# Altium PCB OBDH_Ed02.PcbDoc
Units mm, origin at the board's own origin, x right, y up, seen from the top; angles counter-clockwise.
Board outline 83.95 x 50.04 mm, 4 copper layers (Top Layer, GND, POWER, Bottom Layer), stack 1.57 mm thick; 100 components, 59 nets, 297 pads, 157 vias.
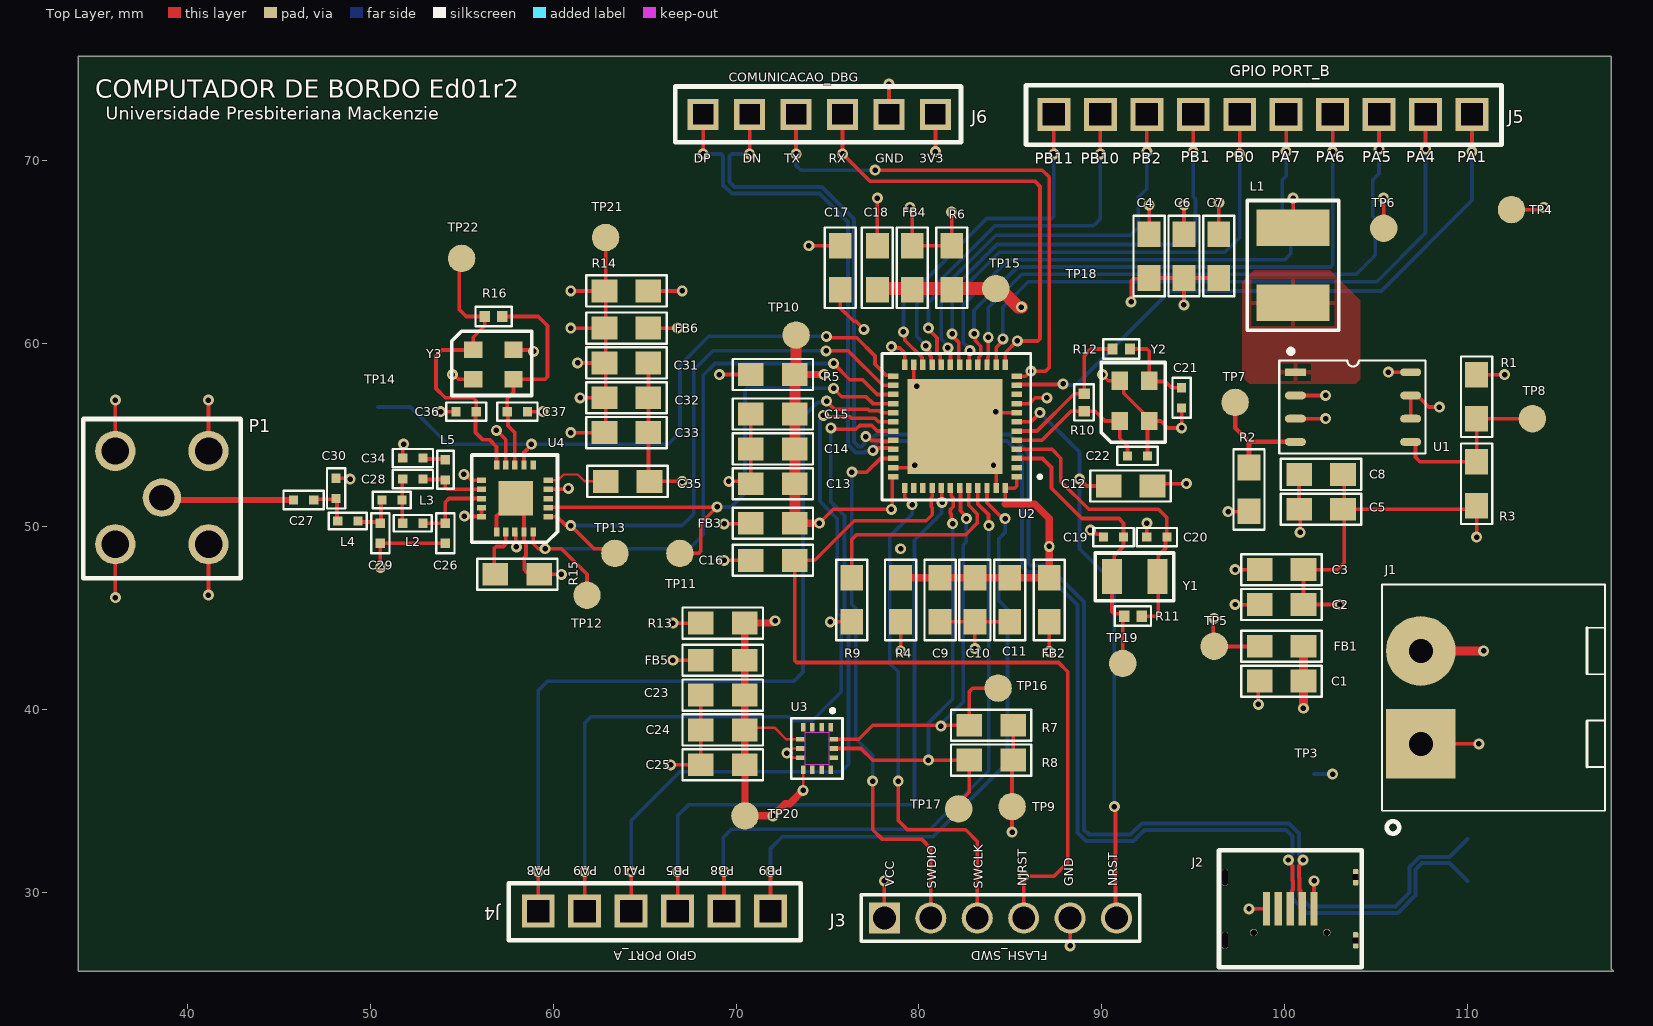
[diagram p0: Top Layer view]
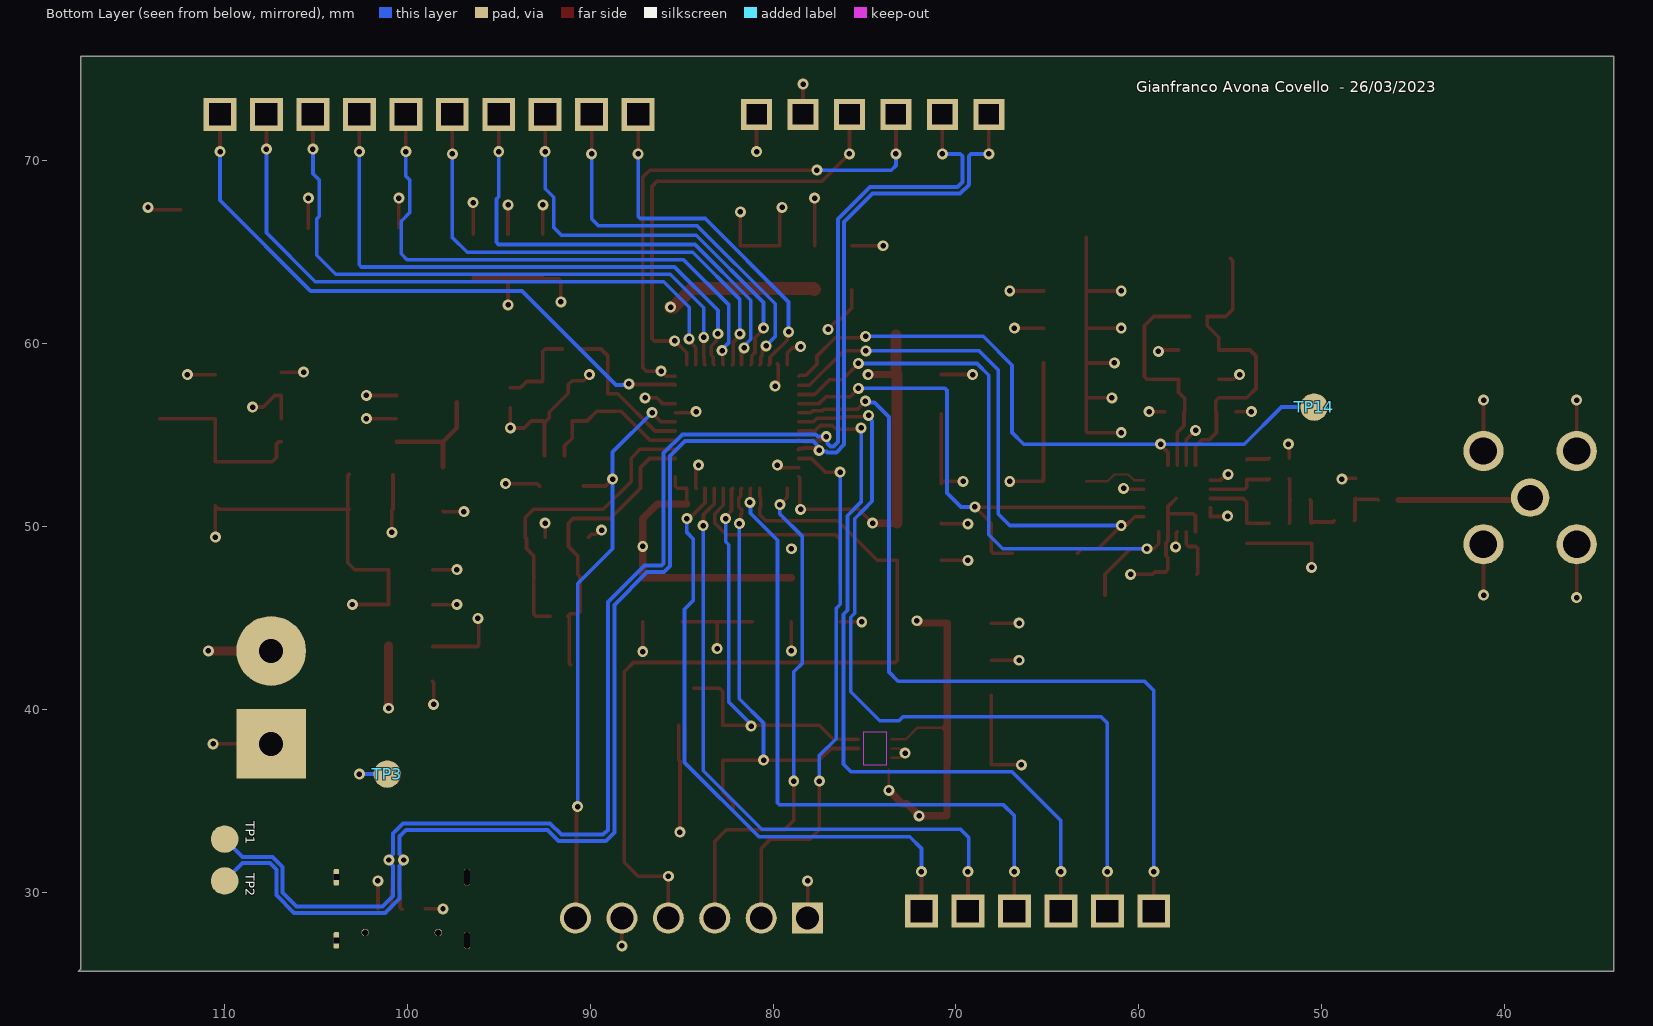
[diagram p1: Bottom Layer view, seen from below]
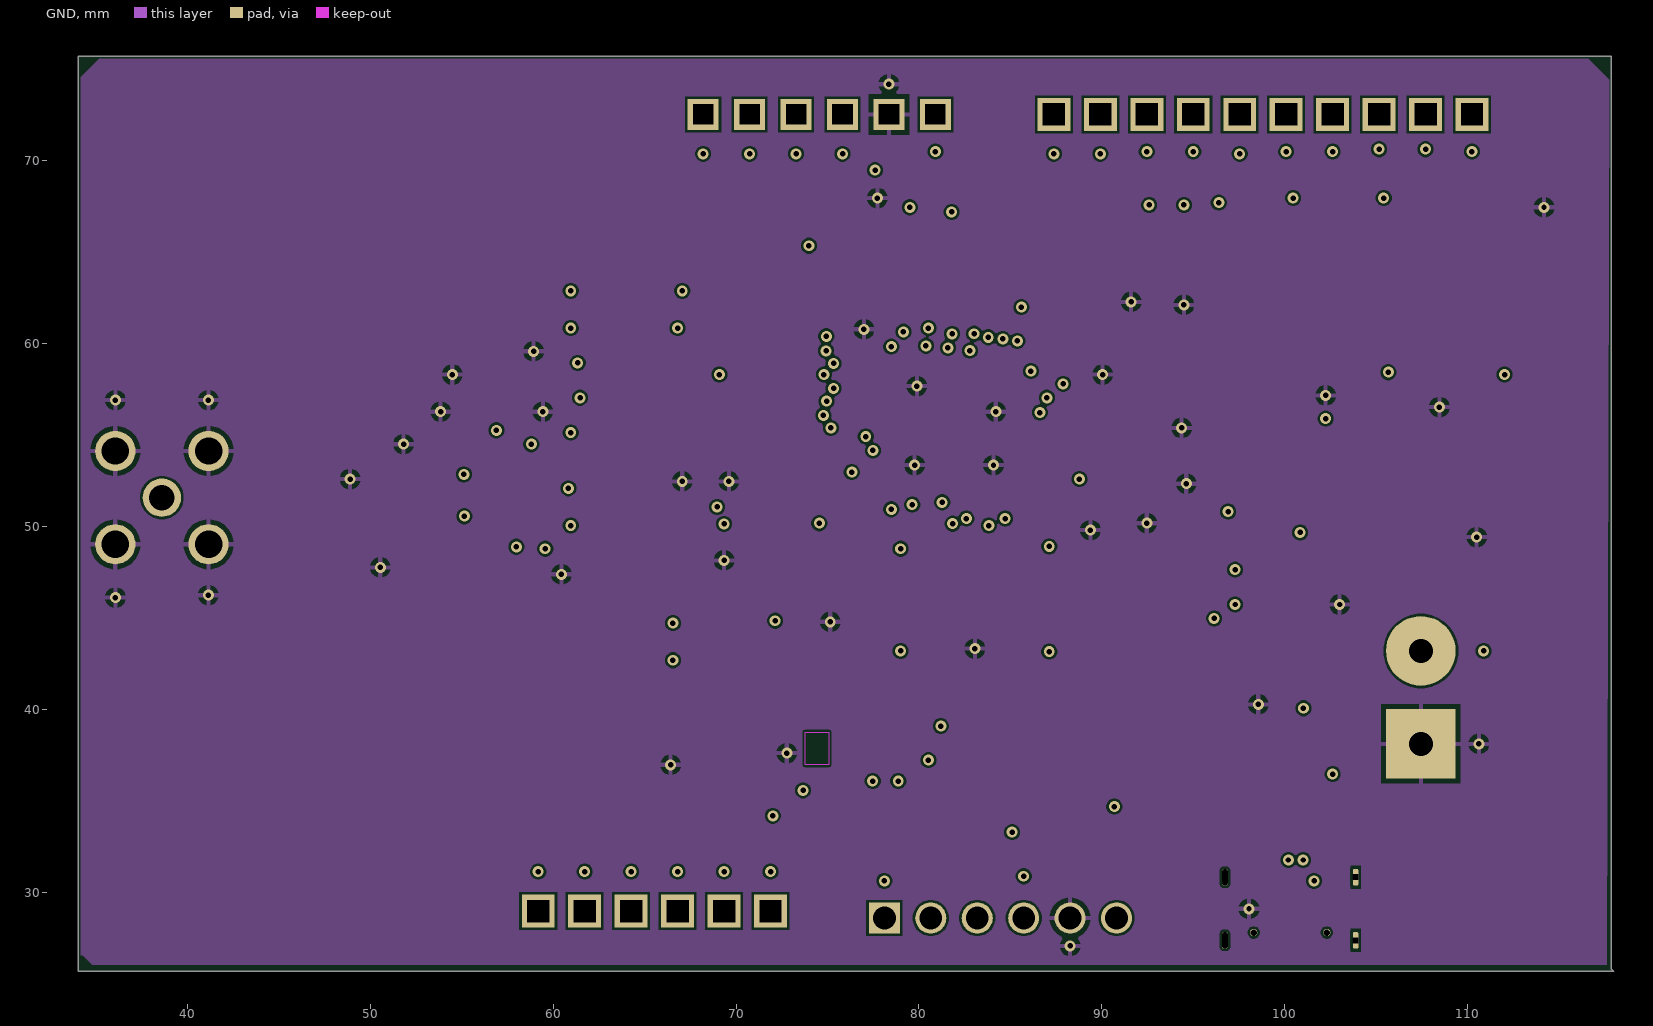
[diagram p2: GND]
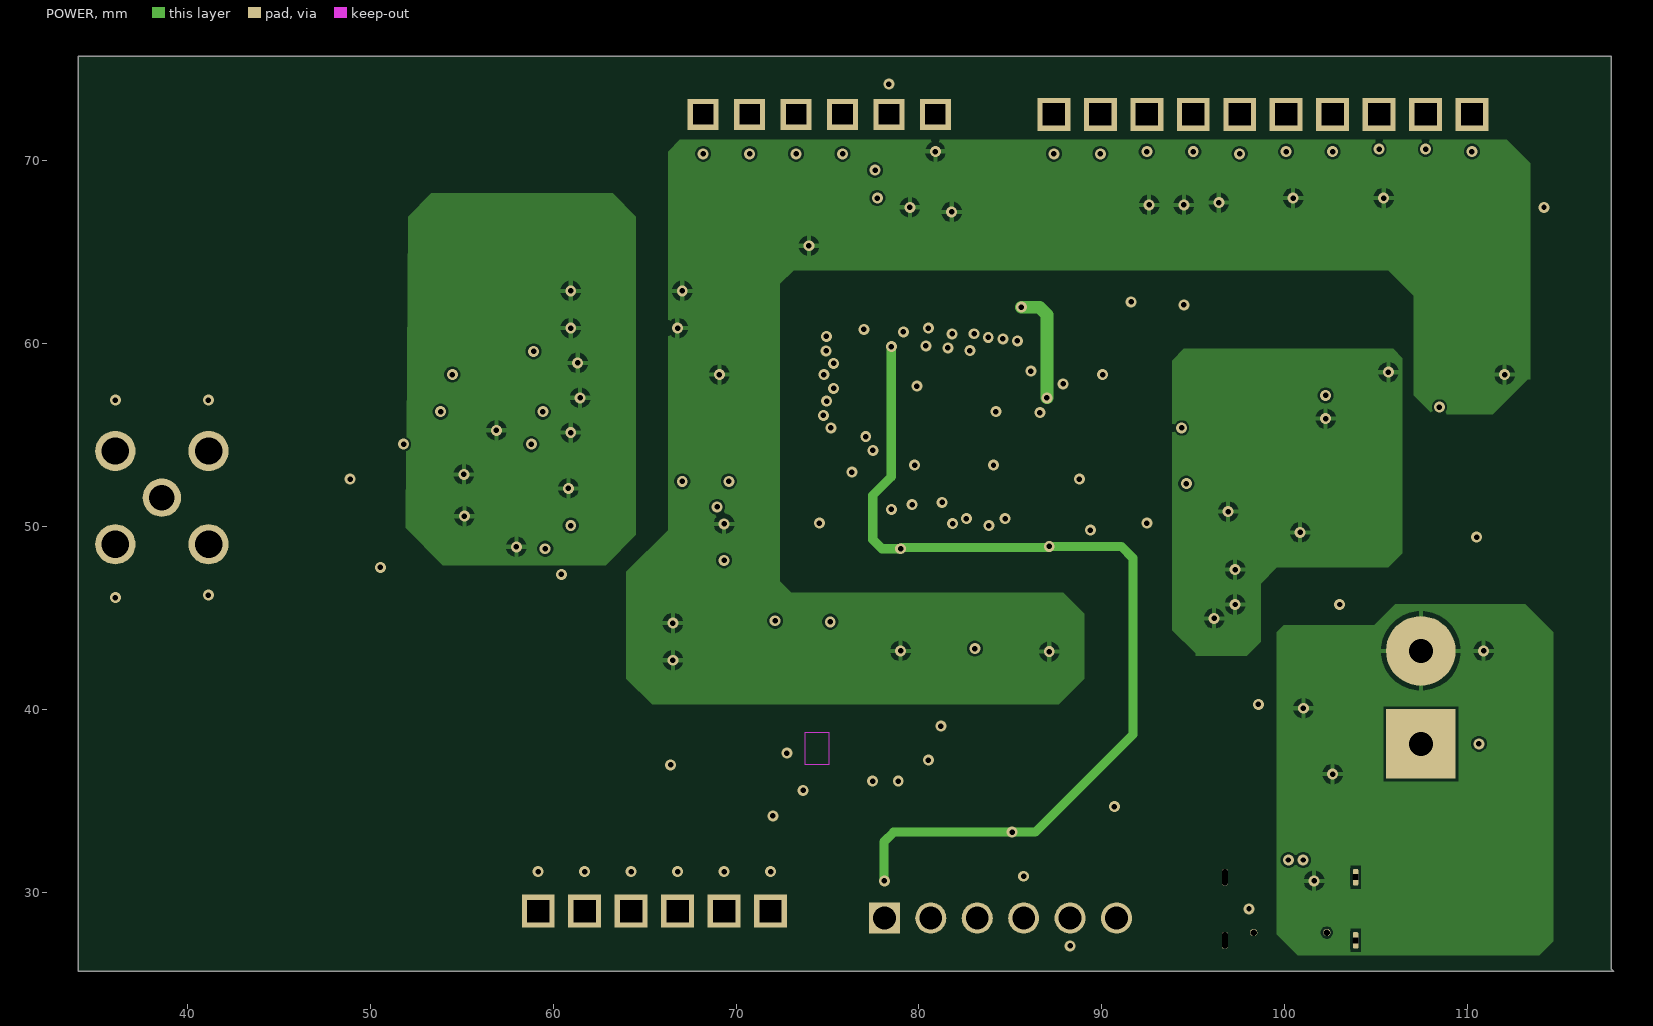
[diagram p3: POWER]
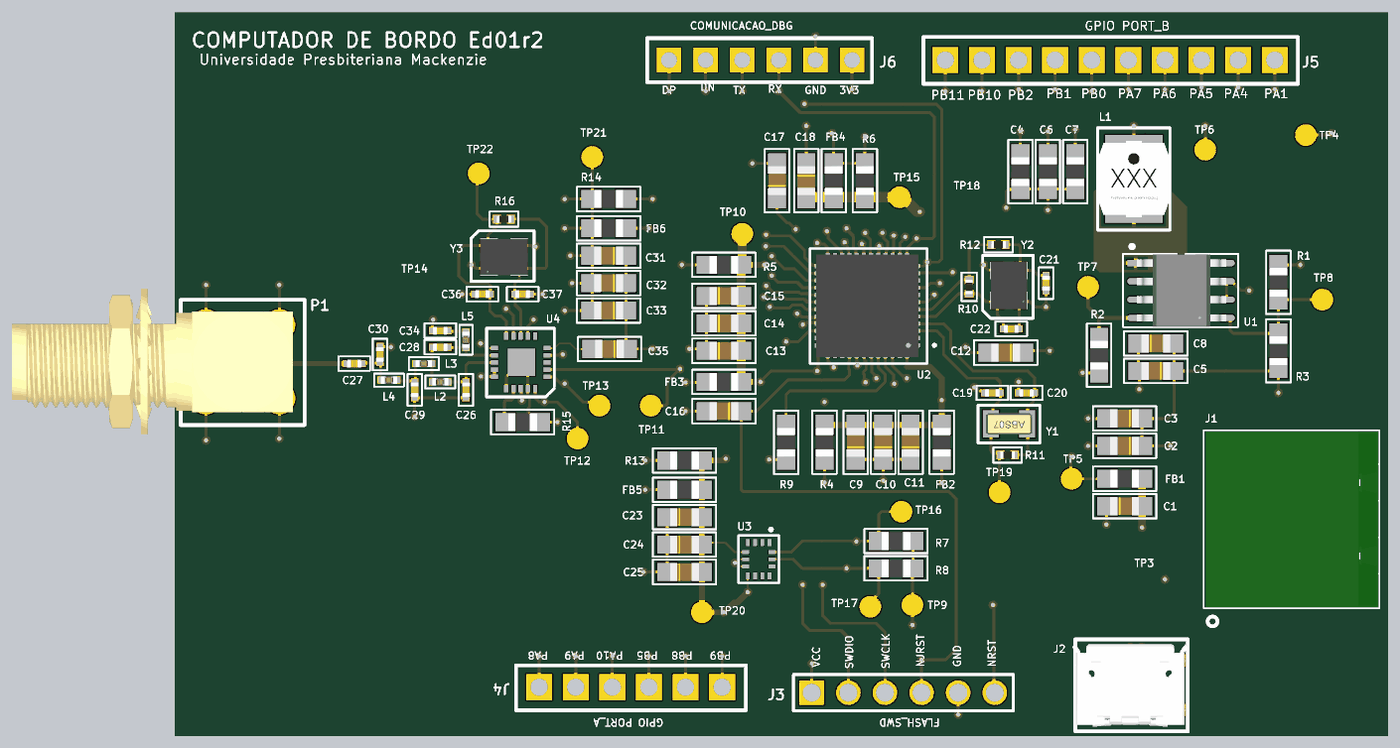
[diagram p4: 3D render of the assembled board from above, using the file's embedded part models]

## Layer stack, top to bottom
Top Solder: solder mask 0.0127, Solder Resist, Dk 3.8
Top Layer: signal copper 0.035
Dielectric 2: prepreg 0.2, PP-022, Dk 4.6
GND: signal copper 0.0175
Dielectric 1: dielectric 1.065, FR-4, Dk 4.6
POWER: signal copper 0.0175
Dielectric 3: prepreg 0.2, PP-022, Dk 4.6
Bottom Layer: signal copper 0.035
Bottom Solder: solder mask 0.0127, Solder Resist, Dk 3.8

## Board outline
34.036,25.654 34.036,75.692 117.856,75.692 117.856,25.781 117.983,25.654

## Design rules (kind name [scope] priority, off if disabled: settings)
Clearance [All] p1: gap=0.127 ignorepadtopadclearanceinfootprint=FALSE
DiffPairsRouting USB [InDifferentialPairClass('USB')] p1: maxlimit=0.127 minlimit=0.127 mostfreqgap=0.127 toplayer_minwidth=0.221 toplayer_maxwidth=0.221 toplayer_prefwidth=0.221 midlayer1_minwidth=0.139 midlayer1_maxwidth=0.139 midlayer1_prefwidth=0.139 midlayer2_minwidth=0.139 midlayer2_maxwidth=0.139 midlayer2_prefwidth=0.139 bottomlayer_minwidth=0.221 bottomlayer_maxwidth=0.221 bottomlayer_prefwidth=0.221 impedanceprofiledriven=TRUE impedanceprofileid={65390795-6F6D-4E48-AEC6-24EED3B5045F} impedanceprofilevalue=90.000000 maxuncoupledlength=12.7
DiffPairsRouting [All] p2: maxlimit=0.4 minlimit=0.2 mostfreqgap=0.2 toplayer_minwidth=0.2 toplayer_maxwidth=0.35 toplayer_prefwidth=0.2 midlayer1_minwidth=0.2 midlayer1_maxwidth=0.35 midlayer1_prefwidth=0.2 midlayer2_minwidth=0.2 midlayer2_maxwidth=0.35 midlayer2_prefwidth=0.2 bottomlayer_minwidth=0.2 bottomlayer_maxwidth=0.35 bottomlayer_prefwidth=0.2 maxuncoupledlength=12.7
PolygonConnect [All] p1: connectstyle=Relief reliefconductorwidth=0.254 reliefentries=4 polygonreliefangle="90 Angle" airgapwidth=0.254
RoutingVias RoutingVias_1 [All] p1: holewidth=0.3 width=0.6 viastyle="Through Hole" minholewidth=0.2 minwidth=0.5 maxholewidth=0.35 maxwidth=0.65 useviatemplates=TRUE viatemplateguid#1={2C4AEFF2-67C5-4B75-B1AF-69D1981BC129} viatemplatename#1=v60h30m0mx0
SilkToSolderMaskClearance [IsPad] p1: minsilkscreentomaskgap=0.127 clearancetoexposedcopper=TRUE
SolderMaskExpansion [All] p1: expansion=0.102 istentingtop=FALSE
Width RF [InNetClass('RF')] p1: maxlimit=0.336 minlimit=0.247 preferedwidth=0.336 toplayer_minwidth=0.336 midlayer1_maxwidth=0.247 midlayer1_prefwidth=0.247 midlayer2_maxwidth=0.247 midlayer2_prefwidth=0.247 bottomlayer_minwidth=0.336 impedanceprofiledriven=TRUE impedanceprofileid={8BED2264-0F78-4ACD-9A72-109358A60653} impedanceprofilevalue=50.000000 minimp=50.000000 maximp=50.000000 favimp=50.000000 // RF impedance
Width [All] p2: maxlimit=10 minlimit=0.127 preferedwidth=0.2
28 further rules are at their usual default settings.

## Classes and differential pairs
net class USB: USB_D_N USB_D_P
net class RF: RF_ANTENNA
component class U_INTERFACE_EXT: J3 J4 J5 J6
differential pair class USB: USB_D
component class U_STM32L412CBU6: C9 C10 C11 C12 C13 C14 C15 C16 C17 C18 C19 C20 C21 C22 FB2 FB3 FB4 R4 R5 R6 R7 R8 R9 R10 R11 R12 TP9 TP10 TP11 TP12 TP13 TP14 TP15 TP16 TP17 TP18 TP19 U2 Y1 Y2
component class U_ST1S40IDR: C4 C5 C6 C7 C8 L1 R1 R2 R3 TP5 TP6 TP7 TP8 U1
component class U_LSM6DSOTR: C23 C24 C25 FB5 R13 TP20 U3
component class U_KH-TYPE-C-16P: C1 C2 C3 FB1 J1 J2 TP1 TP2 TP3 TP4
component class U_CC1101RGPR: C26 C27 C28 C29 C30 C31 C32 C33 C34 C35 C36 C37 FB6 L2 L3 L4 L5 P1 R14 R15 R16 TP21 TP22 U4 Y3
differential pair USB_D: +USB_D_P -USB_D_N

## Components (designator, comment, footprint, x,y, rotation, side; value= is the part's Value field where it differs from the comment)
C1 "CC0805JRNPO9BN101" CAP_0805 99.822,41.529 r0 top
C2 "CC0805JRNPO9BN101" CAP_0805 99.822,45.72 r180 top
C3 "CC0805JRNPO9BN101" CAP_0805 99.822,47.625 r180 top
C4 "CL21A226MPQNNNE" 0805 92.583,64.77 r90 top
C5 "CL21B105KAFNNNE" CAP_0805 101.981,50.927 r180 top
C6 "CL21B225KAFNNNE" 0805 94.488,64.77 r90 top
C7 "CC0805KRX7R6BB224" 0805 96.393,64.77 r90 top
C8 "CL21A106KAYNNNE" CAP_0805 101.981,52.832 r0 top
C9 "CC0805JRNPO9BN101" CAP_0805 81.153,45.974 r90 top
C10 "CC0805JRNPO9BN101" CAP_0805 83.058,45.974 r90 top
C11 "CC0805JRNPO9BN101" CAP_0805 84.963,45.974 r90 top
C12 "CL05B104KO5NNNC" CAP_0805 91.567,52.197 r180 top
C13 "CC0805JRNPO9BN101" CAP_0805 72.009,52.324 r0 top
C14 "CC0805JRNPO9BN101" CAP_0805 72.009,54.229 r0 top
C15 "CC0805JRNPO9BN101" CAP_0805 72.009,56.134 r0 top
C16 "CL05B104KO5NNNC" CAP_0805 72.009,48.133 r180 top
C17 "CC0805JRNPO9BN101" CAP_0805 75.692,64.135 r90 top
C18 "CC0805JRNPO9BN101" CAP_0805 77.724,64.135 r270 top
C19 "GRM1555C1H100FA01D" "CAP 0402" 90.636,49.403 r0 top
C20 "GRM1555C1H100FA01D" "CAP 0402" 93.006,49.403 r0 top
C21 "GRM1555C1H100FA01D" "CAP 0402" 94.361,57.023 r90 top
C22 "GRM1555C1H100FA01D" "CAP 0402" 91.948,53.848 r180 top
C23 "CC0805JRNPO9BN101" CAP_0805 69.272,40.767 r0 top
C24 "CC0805JRNPO9BN101" CAP_0805 69.272,38.862 r0 top
C25 "CC0805JRNPO9BN101" CAP_0805 69.272,36.957 r0 top
C26 "GJM1555C1H3R9WB01D" "CAP 0402" 54.102,49.615 r270 top
C27 "GRM155R71H221JA01D" "CAP 0402" 46.355,51.435 r180 top
C28 "GJM1555C1H3R9WB01D" "CAP 0402" 52.324,52.578 r180 top
C29 "GCM1555C1H8R2CA16D" "CAP 0402" 50.546,49.615 r270 top
C30 "GRM1555C1H5R6CA01D" "CAP 0402" 48.133,52.07 r270 top
C31 "CC0805JRNPO9BN101" CAP_0805 64.008,58.928 r180 top
C32 "CC0805JRNPO9BN101" CAP_0805 64.008,57.023 r180 top
C33 "CC0805JRNPO9BN101" CAP_0805 64.008,55.118 r180 top
C34 "GRM155R71H221JA01D" "CAP 0402" 52.324,53.721 r0 top
C35 "CL05B104KO5NNNC" CAP_0805 64.065,52.451 r180 top
C36 "GCM1555C1H270JA16D" "CAP 0402" 55.245,56.261 r0 top
C37 "GCM1555C1H270JA16D" "CAP 0402" 58.039,56.261 r180 top
FB1 "MPZ2012S331AT000" IND_0805 99.822,43.434 r180 top
FB2 "MPZ2012S331AT000" IND_0805 87.122,45.974 r90 top
FB3 "MPZ2012S331AT000" IND_0805 72.009,50.165 r0 top
FB4 "MPZ2012S331AT000" IND_0805 79.629,64.135 r270 top
FB5 "MPZ2012S331AT000" IND_0805 69.272,42.672 r0 top
FB6 "MPZ2012S331AT000" IND_0805 64.008,60.833 r180 top
J1 "796638-2" "CONN TERM BLOCK 2POS 5.08MM" 107.442,38.1 r90 top
J2 "USB-111HF-B-CU" USB-111HF-B-CU 101.6,29.083 r270 top
J3 "CONN_SWD" CONN_5POS_2.54MM 78.105,28.575 r90 top
J4 "CONN PORTS_2.54x6" "CONN_HDR_2.54x6 - PA" 59.182,28.956 r90 top
J5 "CONN PORT_A_2.54x8" "CONN_HDR_2.54x10 - PB" 110.236,72.517 r270 top
J6 "HDR_2.54x6" HDR_2.54X6 80.899,72.517 r270 top
L1 "VLS5045EX-3R3N-H" IND_6.1-4 100.457,64.262 r90 top value=3.3uH
L2 "LQG15HS27NH02D" "IND 0402" 52.324,50.165 r180 top value=27nH
L3 "LQG15HN22NH02D" "IND 0402" 51.181,51.435 r180 top value=22nH
L4 "LQG15HS27NH02D" "IND 0402" 48.768,50.292 r180 top value=27nH
L5 "LQG15HS27NH02D" "IND 0402" 54.102,53.086 r270 top value=27nH
P1 "CONN SMA 50 OHM 5POS" "CONN PTH SMA JACK CONSMA002-L-G" 38.608,51.562 r270 top
R1 "CRCW080562K0JNEA" RES_0805 110.49,57.08 r90 top
R2 "AF0805JR-0710KL" RES_0805 98.044,52.013 r90 top
R3 "RT0805BRD0719K6L" RES_0805 110.49,52.324 r90 top
R4 "RC0805JR-070RL" RES_0805 78.994,45.974 r90 top
R5 "RC0805JR-070RL" RES_0805 72.009,58.293 r0 top
R6 "RC0805JR-070RL" RES_0805 81.788,64.135 r270 top
R7 "AF0805JR-0710KL" RES_0805 83.947,39.116 r0 top
R8 "AF0805JR-0710KL" RES_0805 83.947,37.211 r0 top
R9 "AF0805JR-0710KL" RES_0805 76.327,45.974 r90 top
R10 "CRCW08051M00JNEA" "RES 0402" 89.027,56.769 r90 top
R11 "CRCW08051M00JNEA" "RES 0402" 91.694,45.085 r0 top
R12 "CRCW08051M00JNEA" "RES 0402" 91.059,59.69 r180 top
R13 "RC0805JR-070RL" RES_0805 69.272,44.704 r0 top
R14 "RC0805JR-070RL" RES_0805 64.008,62.865 r180 top
R15 "**CRCW080562K0JNEA" RES_0805 58.039,47.371 r0 top
R16 "CRCW08051M00JNEA" "RES 0402" 56.741,61.468 r0 top
TP1 "TEST_POINT_1.5MM" TESTPOINT_1.5MM#1 109.982,32.893 r270 bottom
TP2 "TEST_POINT_1.5MM" TESTPOINT_1.5MM#1 109.982,30.607 r180 bottom
TP3 "TEST_POINT_1.5MM" TESTPOINT_1.5MM#2 101.092,36.449 r90 top
TP4 "TEST_POINT_1.5MM" TESTPOINT_1.5MM#1 112.395,67.31 r90 top
TP5 "TEST_POINT_1.5MM" TESTPOINT_1.5MM#1 96.139,43.434 r90 top
TP6 "TEST_POINT_1.5MM" TESTPOINT_1.5MM#1 105.41,66.294 r90 top
TP7 "TEST_POINT_1.5MM" TESTPOINT_1.5MM#1 97.282,56.769 r90 top
TP8 "TEST_POINT_1.5MM" TESTPOINT_1.5MM#1 113.538,55.88 r90 top
TP9 "TEST_POINT_1.5MM" TESTPOINT_1.5MM#1 85.09,34.671 r90 top
TP10 "TEST_POINT_1.5MM" TESTPOINT_1.5MM#1 73.279,60.452 r90 top
TP11 "TEST_POINT_1.5MM" TESTPOINT_1.5MM#1 66.929,48.514 r90 top
TP12 "TEST_POINT_1.5MM" TESTPOINT_1.5MM#1 61.849,46.228 r90 top
TP13 "TEST_POINT_1.5MM" TESTPOINT_1.5MM#1 63.373,48.514 r90 top
TP14 "TEST_POINT_1.5MM" TESTPOINT_1.5MM#2 50.419,56.515 r90 top
TP15 "TEST_POINT_1.5MM" TESTPOINT_1.5MM#1 84.201,62.992 r90 top
TP16 "TEST_POINT_1.5MM" TESTPOINT_1.5MM#1 84.328,41.148 r90 top
TP17 "TEST_POINT_1.5MM" TESTPOINT_1.5MM#1 82.169,34.544 r90 top
TP18 "TEST_POINT_1.5MM" TESTPOINT_1.5MM#3 88.773,62.103 r90 top
TP19 "TEST_POINT_1.5MM" TESTPOINT_1.5MM#1 91.137,42.496 r90 top
TP20 "TEST_POINT_1.5MM" TESTPOINT_1.5MM#1 70.485,34.163 r90 top
TP21 "TEST_POINT_1.5MM" TESTPOINT_1.5MM#1 62.865,65.786 r90 top
TP22 "TEST_POINT_1.5MM" TESTPOINT_1.5MM#1 54.991,64.643 r90 top
U1 "ST1S40IDR" SO8-BW 100.584,58.42 r0 top
U2 "STM32L412CBU6" QFN-48 85.344,52.705 r180 top
U3 "LSM6DSOTR" IC_IIM-42351 74.422,37.846 r270 top
U4 "CC1101RGPR" QLP-4X4 59.729,50.515 r180 top
Y1 "ABS07-32.768KHZ-7-T" CRYSTAL_32K 91.801,47.244 r0 top
Y2 "NX3225SA-26MHZ" CRYSTAL-4SMD 90.983,55.753 r90 top
Y3 "NX3225SA-26MHZ" CRYSTAL-4SMD 55.626,59.639 r0 top

## Footprints (in the part's own frame and the unit in brackets; to place one, negate y for a bottom-side part, rotate by r counter-clockwise, add the part's x,y. Pads: shape width x height; smd on the part's side, far side on the other; paste and mask are expansions set on the pad)
0805 [mm] "INDUTOR 0805"
  rect 1.4x1.25 smd mask+0.1: 1(-1.2,0) 2(1.2,0)
  silkscreen extent -2.2,-0.85 2.2,0.85, body extent -1,-0.63 1,0.63, height 0.51
"CAP 0402" [mm] "GT1021_ED02r2"
  rect 0.5x0.5 smd paste-0.04 mask+0.1: 1(-0.55,0) 2(0.55,0)
  silkscreen extent -1.1,-0.5 1.1,0.5, body extent -0.53,-0.27 0.52,0.28, height 0.56
CAP_0805 [mm] "INDUTOR 0805"
  rect 1.4x1.25 smd mask+0.1: 1(-1.2,0) 2(1.2,0)
  silkscreen extent -2.2,-0.85 2.2,0.85, body extent -1,-0.63 1,0.63, height 1.35
"CONN PTH SMA JACK CONSMA002-L-G" [mm] "MTER Ed02r1"
  round 2.1 hole 1.4: 1(0,0)
  round 2.2 hole 1.5: 2(-2.55,2.55) 2(-2.55,-2.55) 2(2.55,2.55) 2(2.55,-2.55)
  silkscreen extent -4.3,-4.3 4.4,4.3, body extent -5.1,-16 5.1,3.5, height 11.7
"CONN TERM BLOCK 2POS 5.08MM" [mm] "NG3_ED03r1"
  rect 3.81x3.81 hole 1.3 paste+0: 1(0,0)
  round 3.81 hole 1.3 paste+0: 2(5.08,0)
  silkscreen extent -4.91,-10.06 8.71,2.13, body extent -3.56,-9.96 8.6,2.04, height 8.61
CONN_5POS_2.54MM [mm]
  rect 1.7x1.7 hole 1.25: 1(0,0)
  round 1.7 hole 1.25: 2(0,-2.54) 3(0,-5.08) 4(0,-7.62) 5(0,-10.16) 6(0,-12.7)
  silkscreen extent -1.27,-13.97 1.27,1.27
"CONN_HDR_2.54x6 - PA" [mm]
  rect 1.8x1.8 hole 1.2 square: 1(0,0) 2(0,-2.54) 3(0,-5.08) 4(0,-7.62) 5(0,-10.16) 6(0,-12.7)
  silkscreen extent -1.6,-14.35 1.52,1.61
"CONN_HDR_2.54x10 - PB" [mm]
  rect 1.8x1.8 hole 1.2 square: 1(0,0) 2(0,-2.54) 3(0,-5.08) 4(0,-7.62) 5(0,-10.16) 6(0,-12.7) 7(0,-15.24) 8(0,-17.78) 9(0,-20.32) 10(0,-22.86)
  silkscreen extent -1.6,-24.38 1.65,1.61
CRYSTAL-4SMD [mm]
  rect 1x0.9 smd: 1(0,0) 2(0,-1.6) 3(2.2,-1.6) 4(2.2,0)
  silkscreen extent -1.17,-2.49 3.2,1.02, body extent -0.53,-2.11 2.77,0.48, height 0.83
CRYSTAL_32K [mm]
  rect 1.1x1.9 smd: 1(-1.25,0) 2(1.25,0)
  silkscreen extent -2.16,-1.32 2.13,1.3, body extent -1.6,-0.75 1.6,0.75, height 0.9
HDR_2.54X6 [mm]
  rect 1.7x1.7 hole 1.1 square mask+0.075: 1(0,0) 2(0,-2.54) 3(0,-5.08) 4(0,-7.62) 5(0,-10.16) 6(0,-12.7)
  silkscreen extent -1.52,-14.22 1.52,1.4
IC_IIM-42351 [mm]
  rect 0.475x0.25 smd mask+0.05: 1(-1.162,0.75) 2(-1.162,0.25) 3(-1.162,-0.25) 4(-1.162,-0.75) 8(1.162,-0.75) 9(1.162,-0.25) 10(1.162,0.25) 11(1.162,0.75)
  rect 0.25x0.475 smd mask+0.05: 5(-0.5,-0.913) 6(0,-0.913) 7(0.5,-0.913) 12(0.5,0.913) 13(0,0.913) 14(-0.5,0.913)
  Keep-Out Layer region: 0.9,-0.65 -0.9,-0.65 -0.9,0.65 0.9,0.65
  silkscreen extent -2.17,-1.4 1.65,1.4
"IND 0402" [mm] "M1 Ed01r2"
  rect 0.5x0.5 smd paste-0.04 mask+0: 1(-0.55,0) 2(0.55,0)
  silkscreen extent -1.04,-0.44 1.04,0.46, body extent -0.56,-0.26 0.56,0.26, height 0.67
IND_6.1-4 [mm]
  rect 2x4 smd: 1(-2.05,0) 2(2.05,0)
  silkscreen extent -3.55,-2.5 3.55,2.5, body extent -2.65,-2.5 2.65,2.5, height 4.36
IND_0805 [mm] "INDUTOR 0805"
  rect 1.4x1.25 smd mask+0.1: 1(-1.2,0) 2(1.2,0)
  silkscreen extent -2.2,-0.85 2.2,0.85, body extent -1,-0.63 1,0.63, height 0.51
QFN-48 [mm]
  rect 0.55x0.3 smd mask+0.04: 1(0,0) 2(0,-0.5) 3(0,-1) 4(0,-1.5) 5(0,-2) 6(0,-2.5) 7(0,-3) 8(0,-3.5) 9(0,-4) 10(0,-4.5) 11(0,-5) 12(0,-5.5) 25(6.75,-5.5) 26(6.75,-5) 27(6.75,-4.5) 28(6.75,-4) 29(6.75,-3.5) 30(6.75,-3) 31(6.75,-2.5) 32(6.75,-2) 33(6.75,-1.5) 34(6.75,-1) 35(6.75,-0.5) 36(6.75,0)
  rect 0.3x0.55 smd mask+0.04: 13(0.625,-6.125) 14(1.125,-6.125) 15(1.625,-6.125) 16(2.125,-6.125) 17(2.625,-6.125) 18(3.125,-6.125) 19(3.625,-6.125) 20(4.125,-6.125) 21(4.625,-6.125) 22(5.125,-6.125) 23(5.625,-6.125) 24(6.125,-6.125) 37(6.125,0.625) 38(5.625,0.625) 39(5.125,0.625) 40(4.625,0.625) 41(4.125,0.625) 42(3.625,0.625) 43(3.125,0.625) 44(2.625,0.625) 45(2.125,0.625) 46(1.625,0.625) 47(1.125,0.625) 48(0.625,0.625)
  rect 5.2x5.2 smd mask+0.04: 47(3.378,-2.743)
  silkscreen extent -1.3,-6.73 7.37,1.27, body extent -0.18,-6.3 6.93,0.81, height 0.9
QLP-4X4 [mm]
  rect 0.5x0.3 smd mask+0.07: 1(0,0) 2(0,-0.5) 3(0,-1) 4(0,-1.5) 5(0,-2) 11(3.65,-2) 12(3.65,-1.5) 13(3.65,-1) 14(3.65,-0.5) 15(3.65,0)
  rect 0.3x0.5 smd mask+0.07: 6(0.825,-2.825) 7(1.325,-2.825) 8(1.825,-2.825) 9(2.325,-2.825) 10(2.825,-2.825) 16(2.825,0.825) 17(2.325,0.825) 18(1.825,0.825) 19(1.325,0.825) 20(0.825,0.825)
  rect 1.9x1.9 smd mask+0.07: 21(1.778,-1.016)
  silkscreen extent -0.51,-3.38 4.19,1.4
"RES 0402" [mm] "GT1021_ED02r2"
  rect 0.57x0.62 smd paste-0.05 mask+0.05: 1(-0.48,0) 2(0.48,0)
  silkscreen extent -0.99,-0.53 0.99,0.53, body extent -0.5,-0.25 0.5,0.25, height 0.36
RES_0805 [mm] "INDUTOR 0805"
  rect 1.4x1.25 smd mask+0.1: 1(-1.2,0) 2(1.2,0)
  silkscreen extent -2.2,-0.85 2.2,0.85, body extent -1,-0.63 1,0.63, height 0.51
SO8-BW [mm]
  rect 1.15x0.43 smd: 1(0,0)
  oval 1.15x0.43 smd: 2(0,-1.27) 3(0,-2.54) 4(0,-3.81) 5(6.3,-3.81) 6(6.3,-2.54) 7(6.3,-1.27) 8(6.3,0)
  silkscreen extent -0.89,-4.44 7.11,1.27, body extent 0.08,-4.42 6.27,0.61, height 1.77
TESTPOINT_1.5MM#1 [mm] "GT1021_ED04R1"
  round 1.5 smd paste-1: 1(0,0)
TESTPOINT_1.5MM#2 [mm] "GT1021_ED04R1"
  round 1.5 smd far side paste-1: 1(0,0)
TESTPOINT_1.5MM#3 [mm] "GT1021_ED04R1"
USB-111HF-B-CU [mm]
  rect 1.85x0.4 smd mask+0.075: 1(0,0) 2(0,-0.65) 3(0,-1.3) 4(0,-1.95) 5(0,-2.6)
  rrect50% 0.9x0.3 hole 0.3 square mask+0.075: 9(-1.725,2.275) 9(1.725,2.275)
  rrect50% 0.9x0.3 hole 0.3 slot 0.9 at 0 deg mask+0.075: 9(-1.725,-4.875) 9(1.725,-4.875)
  round 0.4 hole 0.35 mask+0.075: 13(1.3,0.7)
  round 0.4 hole 0.35 paste+0 mask+0.075: 14(1.3,-3.3)
  silkscreen extent -3.2,-5.2 3.2,2.6, body extent -2.86,-5.44 2.94,2.65, height 2.73

## Part data
C1 C2 C3 C9 C10 C11 C13 C14 C15 C17 C18 C23 C24 C25 C31 C32 C33: "CAP CER 100PF 50V C0G/NPO 0805", Case/Package=0805, Manufacturer=YAGEO, Manufacturer Part Number=CC0805JRNPO9BN101, Origem=OBDH_Ed02, Valor="100pF 50V"
C4: "CAP CER 22UF 10V X5R 0805", Case/Package=0805, Manufacturer="Samsung Electro-Mechanics", Manufacturer Part Number=CL21A226MPQNNNE, Origem=OBDH_Ed02, Valor="22uF 10V"
C5: "CAP CER 1UF 25V X7R 0805", Case/Package=0805, Manufacturer="Samsung Electro-Mechanics", Manufacturer Part Number=CL21B105KAFNNNE, Origem=OBDH_Ed02, Valor="1uF 25V"
C6: "CAP CER 2.2UF 10V X5R 0805", Case/Package=0805, Manufacturer="Samsung Electro-Mechanics", Manufacturer Part Number=CL21B225KAFNNNE, Origem=OBDH_Ed02, Valor="2.2uF 10V"
C7: "CAP CER 0.22uF 10V X5R 0805", Case/Package=0805, Manufacturer=YAGEO, Manufacturer Part Number=CC0805KRX7R6BB224, Origem=OBDH_Ed02, Valor="0.22uF 10V"
C8: "CAP CER 10UF 25V X5R 0805", Case/Package=0805, Manufacturer="Samsung Electro-Mechanics", Manufacturer Part Number=CL21A106KAYNNNE, Origem=OBDH_Ed02, Valor="10uF 25V"
C12 C16 C35: "CAP CER 0.1UF 16V X5R 0805", Case/Package=0805, Manufacturer="Samsung Electro-Mechanics", Manufacturer Part Number=CL05B104KO5NNNC, Origem=OBDH_Ed02, Valor="0.1uF 16V"
C19 C20 C21 C22: "CAP CER 10PF 50V C0G/NP0 0402", Case/Package=0402, Manufacturer="Murata Electronics", Manufacturer Part Number=GRM1555C1H100FA01D, Valor=10pF
C26 C28: "CAP CER 3.9PF 50V C0G/NP0 0402", Case/Package=0402, Manufacturer="Murata Electronics", Manufacturer Part Number=GJM1555C1H3R9WB01D, Valor=3.9pF
C27 C34: "CAP CER 220PF 50V X7R 0402", Case/Package=0402, Manufacturer="Murata Electronics", Manufacturer Part Number=GRM155R71H221JA01D, Valor=220pF
C29: "CAP CER 8.2PF 50V C0G/NP0 0402", Case/Package=0402, Manufacturer="Murata Electronics", Manufacturer Part Number=GCM1555C1H8R2CA16D, Valor=8.2pF
C30: "CAP CER 5.6PF 50V C0G/NP0 0402", Case/Package=0402, Manufacturer="Murata Electronics", Manufacturer Part Number=GRM1555C1H5R6CA01D, Valor=5.6pF
C36 C37: "CAP CER 27PF 50V C0G/NP0 0402", Case/Package=0402, Manufacturer="Murata Electronics", Manufacturer Part Number=GCM1555C1H270JA16D, Valor=27pF
FB1 FB2 FB3 FB4 FB5 FB6: "FERRITE BEAD 330 OHM 0805 1LN", Case/Package=0805, Manufacturer="TDK Corporation", Manufacturer Part Number=MPZ2012S331AT000, Valor="330R @ 2.5A"
J1: "CONN TERM BLOCK HDR 2POS 90DEG 5.08MM", Case/Package=PTH, Manufacturer="TE Connectivity AMP Connectors", Manufacturer Part Number=796638-2, Origem=GT1021_Ed04r2, Valor="CONN 2POS 5.08MM"
J2: "Female 5 Micro-B Surface Mount SMD USB Connectors ROHS"
J4: "CONN HDR FEMALE 2.54 x 6POS"
J5: "CONN HDR FEMALE 2.54 x 8POS"
J6: "CONN HDR FEMALE 2.54x6"
L1: "FIXED IND 3.3UH 4.2A 35.1MOHM SM", Manufacturer Part Number=VLS5045EX-3R3N-H
L2 L4 L5: "FIXED IND 27NH 350MA 460MOHM SMD", Case/Package=0402, Manufacturer="Murata Electronics", Manufacturer Part Number=LQG15HS27NH02D
L3: "FIXED IND 22NH 350MA 580MOHM SMD", Case/Package=0402, Manufacturer="Murata Electronics", Manufacturer Part Number=LQG15HN22NH02D
P1: "CONN SMA JACK R/A 50OHM PCB"
R1: "RES SMD 62K OHM 5% 1/8W 0805", Case/Package=0805, Manufacturer=YAGEO, Manufacturer Part Number=CRCW080562K0JNEA, Valor=62K
R2 R7 R8 R9: "RES SMD 10K OHM 5% 1/8W 0805", Case/Package=0805, Manufacturer=YAGEO, Manufacturer Part Number=AF0805JR-0710KL, Valor=10K
R3: "RES SMD 19.6K OHM 5% 1/8W 0805", Case/Package=0805, Manufacturer=YAGEO, Manufacturer Part Number=RT0805BRD0719K6L, Valor=19.6k
R4 R5 R6 R13 R14: "RES 0 OHM JUMPER 1/8W 0805", Case/Package=0805, Manufacturer=YAGEO, Manufacturer Part Number=RC0805JR-070RL, Valor=0R
R10 R11 R12 R16: "RES SMD 1M OHM 5% 1/8W 0805", Case/Package=0805, Manufacturer="Vishay Intertech", Manufacturer Part Number=CRCW08051M00JNEA, Valor=1M
R15: "RES SMD 56K OHM 5% 1/8W 0805", Case/Package=0805, Manufacturer=YAGEO, Manufacturer Part Number=CRCW080562K0JNEA, Valor=56K
TP1 TP2 TP3 TP4 TP5 TP6 TP7 TP8 TP9 TP10 TP11 TP12 TP13 TP14 TP15 TP16 TP17 TP18 TP19 TP20 TP21 TP22: "TEST_POINT", Case/Package=SMD, Manufacturer=-, Manufacturer Part Number=TEST_POINT, Origem=-
U1: "IC REG BUCK ADJUSTABLE 3A 8SO"
U2: "ARM® Cortex®-M4 STM32L4 Microcontroller IC 32-Bit Single-Core 80MHz 128KB (128K x 8) FLASH 48-LQFP (7x7)"
U3: "Accelerometer, Gyroscope, 6 Axis Sensor I²C, SPI Output"
U4: "IC RF TXRX ISM<1GHZ 20VFQFN"
Y1: "CRYSTAL 32.7680KHZ 7PF SMD", Case/Package=2-SMD, Manufacturer="Abracon LLC", Manufacturer Part Number=ABS07-32.768KHZ-7-T, Valor="32.768 kHz"
Y2 Y3: "CRYSTAL 26.0000MHZ 10PF SMD", Manufacturer="NDK America, Inc.", Manufacturer Part Number=NX3225SA-26MHZ, Valor="26MHz 8pF"

## Via types
v1: diameter 0.6/0.6/0.6/0.6 (per signal layer), hole 0.3, Top Layer to Bottom Layer, tented both sides, 157 vias

## Nets (pads, with @x,y where several pads share a name; then routed paths per layer and width w, separated by ;. In a path a pad name is that pad's centre, name@x,y a point inside that pad or via, vN(x,y) a via of type N, cw(c..) or ccw(c..) an arc to the next point about the centre after c; other vN are vias at no path point)
3V3: C4.2 C6.2 C7.2 C17.2 FB2.1 FB3.1 FB4.1 FB5.1 FB6.1 J6.1 L1.2 R1.2 R4.1 R5.1 R6.1 R13.1 R14.1 TP6.1 | length 32.2
  Top Layer w0.2: FB6.1 v1(66.802,60.833) ; R14.1 v1(67.056,62.865) ; v1(66.548,42.672) FB5.1 ; v1(66.548,44.704) R13.1 ; v1(69.088,58.293) R5.1 ; v1(69.342,50.127) 70.771,50.127 FB3.1 ; v1(73.984,65.335) C17.2 ; v1(78.994,43.18) R4.1 ; v1@79.629,67.183 FB4.1 R6.1 v1(81.788,67.183) ; v1(80.899,70.485) J6.1 ; v1(87.122,43.145) FB2.1 ; C4.2 v1(92.583,67.564) ; C6.2 v1(94.488,67.564) ; C7.2 v1(96.393,67.691) ; L1.2 v1(100.457,67.945) ; TP6.1 v1(105.41,67.945) ; R1.2 112.001,58.28 v1(112.014,58.293)
  other v1: 79.502,67.437
+VDD_IMU: C23.2 C24.2 C25.2 FB5.2 R13.2 TP20.1 U3.5 U3.8 | length 20.5
  Top Layer w0.127: C24.2@70.599,38.989 72.096,38.989 72.739,38.346 U3.5 ; v1@73.666,35.566 U3.8@73.666,36.678
  Top Layer w0.4: C24.2@70.599,38.989 C24.2 ; v1(72.136,44.831) 72.009,44.704 R13.2 FB5.2 C23.2 C24.2 ; v1@73.666,35.566 v1(73.66,35.56) 72.93,34.83 72.676,34.83 v1(72.009,34.163) TP20.1 70.485,36.944 C25.2 C24.2
+VIN: C1.2 FB1.1 J1.2 J2.1 TP3.1 | length 9.4
  Top Layer w0.2: J2.1 v1(101.6,30.607)
  Top Layer w0.5: v1(101.022,40.048) C1.2 FB1.1 ; J1.2 v1(110.871,43.18)
  Bottom Layer w0.2: TP3.1@101.6,36.449 v1(102.616,36.449)
DVDD: C31.2 C32.2 C33.2 FB6.2 R14.2 TP21.1 U4.4 U4.9 U4.11 U4.14 U4.15 U4.18 | length 25.7
  Top Layer w0.2: v1(55.118,52.832) 55.218,52.832 55.529,52.521 56.073,52.521 U4.11 ; v1(55.143,50.546) 55.159,50.531 56.064,50.531 U4.15 U4.14 ; v1(56.896,55.245) 57.404,54.737 U4.9 ; U4.18 57.945,49.649 57.945,48.918 v1(57.986,48.876) ; U4.4 60.778,52.015 v1(60.833,52.07) ; v1(60.96,55.118) C33.2 62.865,55.175 62.865,57.023 62.865,58.928 62.865,60.833 62.865,62.865 TP21.1 ; v1(60.96,60.833) FB6.2 ; v1(60.96,62.865) R14.2 ; v1(61.341,58.928) C31.2 ; v1(61.468,57.023) C32.2
EN: R2.2 TP7.1 U1.4 | length 6.5
  Top Layer w0.25: TP7.1 97.282,55.372 98.044,54.61 98.044,54.483 ; R2.2 98.044,54.483 ; U1.4 98.171,54.61 98.044,54.483
FB: R1.1 R3.2 TP8.1 U1.5 | length 9.9
  Top Layer w0.2: U1.5 107.038,54.61 107.144,54.504 107.144,53.765 107.385,53.524 R3.2 R1.1 TP8.1
GND: C1.1 C2.1 C3.1 C4.1 C5.1 C6.1 C7.1 C8.2 C9.1 C10.1 C11.1 C12.1 C13.1 C14.1 C15.1 C16.2 C17.1 C18.1 C19.1 C20.1 C21.1 C22.1 C23.1 C24.1 C25.1 C26.2 C29.2 C30.1 C31.1 C32.1 C33.1 C34.1 C35.1 C36.1 C37.1 J1.1 J2.5 J3.5 J6.2 P1.2 R3.1 R9.1 R15.2 TP4.1 U1.2 U1.6 U1.7 U2.8 U2.23 U2.35 U2.47 U3.6 U3.7 U4.16 U4.19 U4.21 Y2.2 Y2.4 Y3.2 Y3.4 | length 124.7
  Top Layer w0.127: v1(72.771,37.592) v1@72.827,37.592 ; U3.7@73.501,37.338 73.081,37.338 v1@72.827,37.592 ; U3.6 73.081,37.846 v1@72.827,37.592
  Top Layer w0.2: P1.2@36.058,49.012 36.063,49.007 36.063,46.106 v1(36.068,46.101) ; P1.2@36.058,54.112 36.063,54.117 36.063,56.891 v1(36.068,56.896) ; v1(41.148,46.228) 41.153,46.233 41.153,49.007 P1.2@41.158,49.012 ; v1(41.148,56.896) 41.153,56.891 41.153,54.117 P1.2@41.158,54.112 ; C30.1 48.853,52.62 v1(48.895,52.578) ; v1(50.546,47.752) C29.2 C26.2 ; C34.1 51.774,54.441 v1(51.816,54.483) ; v1(53.848,56.261) C36.1 ; v1(54.483,58.293) 54.572,58.293 54.826,58.039 Y3.2 ; U4.16 56.904,50.556 57.021,50.673 U4.21@58.404,50.673 ; Y3.4 58.852,59.639 v1(58.928,59.563) ; U4.21 58.404,51.078 U4.21@58.404,50.673 ; C37.1 v1(59.436,56.261) ; v1(60.452,47.371) R15.2 59.112,47.498 58.537,47.498 58.42,47.615 58.42,48.308 58.513,48.402 58.513,49.095 58.404,49.204 U4.19 U4.21@58.404,50.673 ; C31.1 C32.1 C33.1 65.208,52.508 C35.1 v1(67.056,52.451) ; v1(66.421,36.957) C25.1 C24.1 C23.1 ; v1(69.342,48.133) C16.2 ; v1(69.604,52.451) 70.682,52.451 C13.1 C14.1 C15.1 ; v1(75.149,44.774) R9.1 ; C17.1 75.692,61.935 76.426,61.201 76.552,61.201 76.984,60.769 v1(76.991,60.769) ; C18.1 v1(77.724,67.945) ; J6.2 v1(78.359,74.168) ; U2.35 79.621,53.205 v1(79.756,53.34) ; U2.23@79.756,58.867 U2.23 79.719,57.822 v1(79.883,57.658) ; C9.1 C10.1 ; v1(83.058,43.307) C10.1 ; v1(84.074,53.34) 84.219,53.195 84.219,52.08 U2.47@84.201,52.062 ; v1(84.201,56.261) 84.257,56.205 U2.8 ; C11.1 C10.1 ; v1(88.265,27.051) J3.5 ; v1(89.373,49.784) 89.481,49.784 89.712,49.553 89.936,49.553 C19.1 ; v1(90.043,58.293) 90.043,58.255 90.345,57.953 Y2.4 91.193,57.743 91.193,57.27 92.233,56.23 92.233,55.933 Y2.2@92.498,55.668 ; v1(91.601,62.265) 91.601,63.418 91.719,63.535 92.548,63.535 C4.1 C6.1 ; C20.1 v1(92.456,50.165) ; C22.1 Y2.2@92.498,55.668 ; C12.1 92.894,52.324 v1(94.615,52.324) ; C21.1 v1(94.361,55.372) 93.599,55.372 93.218,55.753 Y2.2 Y2.2@92.498,55.668 ; v1(94.488,62.103) C6.1 ; C7.1 C6.1 ; v1(98.044,29.083) J2.5 ; v1(98.552,40.259) 98.552,41.459 C1.1 ; U1.2 v1(102.235,57.15) ; v1(102.997,45.72) C2.1 C3.1 102.87,47.625 103.251,48.006 C5.1@103.251,50.927 ; C5.1 C5.1@103.251,50.927 ; C8.2 103.251,52.762 C5.1@103.251,50.927 ; U1.6 U1.7 107.244,57.15 107.879,56.515 v1(108.458,56.515) ; J1.1 v1(110.617,38.1) ; v1(110.49,49.403) R3.1 110.293,50.927 C5.1@103.251,50.927 ; TP4.1 114.046,67.31 v1(114.173,67.437)
I2C_SCL: R8.1 TP17.1 U2.42 U3.13 | length 26.2
  Top Layer w0.2: U3.13 76.835,37.846 77.47,37.211 v1(80.518,37.211) R8.1 82.747,35.451 82.169,34.873 TP17.1 ; U2.42 81.769,52.03 81.769,51.657 81.869,51.557 81.869,51.059 81.702,50.892 81.702,50.726 81.763,50.665 81.763,50.213 v1(81.84,50.137)
  Bottom Layer w0.2: v1(80.518,37.211) 80.518,39.243 81.84,40.565 v1(81.84,50.137)
I2C_SDA: R7.1 TP16.1 U2.43 U3.14 | length 25
  Top Layer w0.2: U3.14 76.7,38.346 77.47,39.116 v1@81.153,39.116 ; v1(81.196,39.073) v1@81.153,39.116 ; U2.43 82.269,52.03 82.269,50.846 82.588,50.527 v1(82.588,50.419) ; TP16.1 82.931,41.148 82.747,40.964 R7.1 v1@81.153,39.116
  Bottom Layer w0.2: v1(81.196,39.073) 81.196,39.159 82.423,40.386 82.423,48.982 82.588,49.147 v1(82.588,50.419)
NetC21_2: C21.2 R12.1 Y2.3 | length 4.6
  Top Layer w0.2: R12.1 92.456,59.69 92.583,59.563 Y2.3 92.624,57.912 93.472,57.912 93.811,57.573 C21.2
NetC27_1: C27.1 C30.2 L4.2 | length 2.5
  Top Layer w0.2: C27.1 46.948,51.477 48.091,51.477 C30.2 48.176,51.478 48.176,50.334 L4.2
NetC28_2: C28.2 L2.2 L3.1 | length 2.4
  Top Layer w0.2: L2.2 51.752,50.186 51.752,51.413 L3.1 51.752,51.456 51.752,52.556 C28.2
NetC29_1: C29.1 L3.2 L4.1 | length 2.6
  Top Layer w0.2: L4.1 49.381,50.228 50.482,50.228 C29.1 50.589,50.208 50.589,51.392 L3.2
NetC34_2: C34.2 L5.1 | length 1.3
  Top Layer w0.2: C34.2 52.917,53.679 54.06,53.679 L5.1
NetC35_2: C35.2 U4.5 | length 3.4
  Top Layer w0.127: U4.5 60.262,52.515 60.579,52.832 61.341,52.832 61.722,52.451 C35.2
NetC36_2: C36.2 R16.1 TP22.1 U4.10 Y3.1 | length 17.2
  Top Layer w0.2: TP22.1 54.864,64.516 54.864,61.849 55.245,61.468 R16.1 56.261,60.96 55.626,60.325 Y3.1 53.924,59.639 53.594,59.309 53.594,57.531 54.102,57.023 55.626,57.023 55.795,56.854 C36.2 55.753,56.219 55.753,55.118 56.134,54.737 56.515,54.737 56.904,54.348 U4.10
NetC37_2: C37.2 R16.2 U4.8 Y3.3 | length 12.4
  Top Layer w0.2: R16.2 59.182,61.468 59.69,60.96 59.69,58.166 59.563,58.039 Y3.3 57.826,57.318 57.489,56.981 C37.2 57.531,56.219 57.531,55.499 57.904,55.126 U4.8
NetR9_2: R9.2 U2.44 | length 11.4
  Top Layer w0.2: R9.2 76.327,49.276 76.588,49.537 82.554,49.537 83.188,50.17 83.188,50.672 82.719,51.141 U2.44
NetR15_1: R15.1 U4.17 | length 2.8
  Top Layer w0.2: R15.1 56.769,47.441 56.769,48.778 56.886,48.895 57.277,48.895 57.404,49.022 U4.17
NJTRST: C16.1 J3.4 U2.40 | length 46.1
  Top Layer w0.2: U2.40 80.719,51.607 80.669,51.557 80.669,51.059 80.719,51.009 80.719,50.62 80.391,50.292 76.454,50.292 74.295,48.133 C16.1 73.209,42.662 73.326,42.545 87.633,42.545 88.138,42.04 88.138,31.623 87.376,30.861 v1(85.725,30.861) J3.4
NRST: C12.2 J3.6 U2.7 | length 32.6
  Top Layer w0.2: U2.7 86.13,55.705 86.609,56.184 v1(86.609,56.216) ; v1(88.773,52.578) 89.154,52.197 C12.2 ; v1(90.678,34.671) 90.742,34.608 90.742,28.639 J3.6
  Bottom Layer w0.2: v1(86.609,56.216) 88.773,54.052 v1(88.773,52.578) 88.773,48.768 90.678,46.863 v1(90.678,34.671)
OSC32_IN: C19.2 R11.1 TP19.1 U2.3 Y1.1 | length 16.6
  Top Layer w0.2: U2.3 86.757,53.705 87.249,53.213 87.249,52.07 88.9,50.419 90.932,50.419 91.186,50.165 C19.2 91.186,48.885 90.678,48.377 90.678,47.371 Y1.1 90.551,45.329 90.668,45.212 91.087,45.212 R11.1 91.137,45.008 TP19.1 TP19.1@91.059,42.418
OSC32_OUT: C20.2 R11.2 U2.4 Y1.2 | length 17
  Top Layer w0.2: U2.4 87.273,54.205 87.757,53.721 87.757,52.451 89.281,50.927 93.091,50.927 93.556,50.462 C20.2 93.482,49.329 93.482,48.778 93.081,48.377 93.081,47.274 Y1.2 93.091,47.204 93.091,45.212 92.964,45.085 R11.2
OSC_IN: C22.2 R10.1 U2.5 Y2.1 | length 8.6
  Top Layer w0.2: U2.5 86.726,54.705 88.31,56.289 R10.1 89.634,56.289 90.17,55.753 Y2.1 90.983,54.813 91.398,54.398 C22.2
OSC_OUT: R10.2 R12.2 U2.6 | length 8.3
  Top Layer w0.2: U2.6 86.447,55.205 88.491,57.249 R10.2 89.027,59.309 89.408,59.69 R12.2
PA1: J5.1 U2.11 | length 33.6
  Top Layer w0.2: U2.11 85.384,57.745 87.844,57.745 v1(87.884,57.785) ; v1(110.236,70.485) J5.1@110.236,72.335
  Bottom Layer w0.2: v1(87.884,57.785) 87.946,57.723 88.584,57.723 93.726,62.865 105.283,62.865 110.236,67.818 v1(110.236,70.485)
PA4: J5.2 U2.14 | length 34.5
  Top Layer w0.2: U2.14 84.219,59.766 84.582,60.129 v1(84.582,60.237) ; v1(107.696,70.612) J5.2@107.696,72.462
  Bottom Layer w0.2: v1(84.582,60.237) 84.582,61.976 85.979,63.373 105.029,63.373 107.696,66.04 v1(107.696,70.612)
PA5: J5.3 U2.15 | length 33.3
  Top Layer w0.2: U2.15 83.769,58.88 83.769,59.229 83.787,59.248 v1(83.787,60.329) ; v1(105.156,70.612) J5.3@105.156,72.462
  Bottom Layer w0.2: v1(83.787,60.329) 83.787,61.943 85.617,63.773 103.905,63.773 104.946,64.814 104.946,66.803 104.81,66.939 104.81,68.927 105.156,69.273 v1(105.156,70.612)
PA6: J5.4 U2.16 | length 31.9
  Top Layer w0.2: v1(83.011,60.523) 83.088,60.447 83.088,60.141 83.383,59.846 83.383,59.349 83.269,59.235 83.269,58.88 U2.16 ; v1(102.616,70.485) J5.4@102.616,72.335
  Bottom Layer w0.2: v1(83.011,60.523) 83.011,61.802 85.382,64.173 102.499,64.173 102.616,64.29 v1(102.616,70.485)
PA7: J5.5 U2.17 | length 30.2
  Top Layer w0.2: U2.17 82.751,58.862 82.751,59.565 v1(82.783,59.598) ; v1(100.076,70.485) J5.5@100.076,72.335
  Bottom Layer w0.2: v1(82.783,59.598) 82.783,59.676 82.411,60.048 82.411,62.091 84.893,64.573 100.006,64.573 100.33,64.897 100.33,66.676 99.857,67.149 99.857,68.927 100.076,69.146 v1(100.076,70.485)
PA8: J4.1 U2.29 | length 46.5
  Top Layer w0.2: J4.1 v1(59.182,31.115) ; v1(74.946,56.839) 75.397,56.388 77.232,56.388 77.315,56.305 77.838,56.305 77.938,56.205 U2.29
  Bottom Layer w0.2: v1(59.182,31.115) 59.182,41.021 59.69,41.529 73.162,41.529 73.66,42.027 73.66,55.967 74.456,56.762 74.869,56.762 v1(74.946,56.839)
PA9: J4.2 U2.30 | length 44.8
  Top Layer w0.2: J4.2 v1(61.722,31.115) ; v1(74.772,56.058) 74.842,55.988 76.228,55.988 76.311,55.905 77.589,55.905 77.789,55.705 U2.30
  Bottom Layer w0.2: v1(61.722,31.115) 61.722,39.243 62.068,39.589 72.898,39.589 73.117,39.37 74.168,39.37 75.749,40.951 75.749,45.023 75.53,45.242 75.53,50.414 75.057,50.887 74.584,51.36 74.584,55.761 74.772,55.95 v1(74.772,56.058)
PA10: J4.3 U2.31 | length 40.5
  Top Layer w0.2: J4.3 v1(64.262,31.115) ; v1(75.184,55.372) 75.258,55.298 76.547,55.298 76.754,55.505 77.424,55.505 77.724,55.205 U2.31
  Bottom Layer w0.2: v1(64.262,31.115) 64.262,33.909 66.929,36.576 75.737,36.576 76.149,36.988 76.149,45.188 75.93,45.407 75.93,50.579 75.184,51.325 v1(75.184,55.372)
PB0: J5.6 U2.18 | length 27.3
  Top Layer w0.2: v1(81.811,60.516) 81.811,60.411 82.183,60.039 82.183,58.866 U2.18 ; v1(97.536,70.358) J5.6@97.536,72.208
  Bottom Layer w0.2: v1(81.811,60.516) 81.811,62.39 84.394,64.973 96.723,64.973 97.536,65.786 v1(97.536,70.358)
PB1: J5.7 U2.19 | length 25.8
  Top Layer w0.2: v1(81.583,59.749) 81.583,59.641 81.719,59.505 U2.19 ; v1(94.996,70.485) J5.7@94.996,72.335
  Bottom Layer w0.2: v1(81.583,59.749) 81.583,59.854 81.211,60.226 81.211,62.356 84.26,65.405 95.006,65.405 95.123,65.522 95.123,67.886 94.996,68.013 v1(94.996,70.485)
PB2: J5.8 U2.20 | length 23.1
  Top Layer w0.2: v1(80.518,60.833) 80.518,60.763 80.983,60.298 80.983,59.501 81.169,59.315 81.169,58.88 U2.20 ; v1(92.456,70.485) J5.8@92.456,72.335
  Bottom Layer w0.2: v1(80.518,60.833) 80.518,62.23 84.201,65.913 91.567,65.913 91.983,66.329 91.983,67.98 92.456,68.453 v1(92.456,70.485)
PB5: J4.4 U2.41 | length 36.3
  Top Layer w0.2: J4.4 v1(66.802,31.115) ; U2.41 81.244,52.055 81.244,51.333 v1(81.269,51.308)
  Bottom Layer w0.2: v1(66.802,31.115) 66.802,34.163 67.402,34.763 79.639,34.763 79.756,34.88 79.756,49.236 81.228,50.708 81.228,51.267 v1(81.269,51.308)
PB8: J4.5 U2.45 | length 35.8
  Top Layer w0.2: J4.5 v1(69.342,31.115) ; U2.45 83.219,51.216 83.797,50.638 83.797,50.061 v1(83.82,50.038)
  Bottom Layer w0.2: v1(69.342,31.115) 69.298,31.159 69.298,32.976 69.752,33.43 80.616,33.43 83.82,36.634 v1(83.82,50.038)
PB9: J4.6 U2.46 | length 34.1
  Top Layer w0.2: J4.6 v1(71.882,31.115) ; U2.46 83.719,51.282 84.421,50.58 84.44,50.58 84.601,50.419 v1(84.709,50.419)
  Bottom Layer w0.2: v1(71.882,31.115) 71.882,32.385 72.517,33.02 80.772,33.02 84.836,37.084 84.836,45.466 84.363,45.939 84.363,49.306 84.709,49.652 v1(84.709,50.419)
PB10: J5.9 U2.21 | length 21
  Top Layer w0.2: v1(80.383,59.866) 80.383,59.757 80.583,59.557 80.583,59.335 80.669,59.249 80.669,58.88 U2.21 ; v1(89.916,70.358) J5.9@89.916,72.208
  Bottom Layer w0.2: v1(80.383,59.866) 79.875,60.374 79.875,61.206 79.883,61.214 79.883,62.161 84.143,66.421 89.535,66.421 89.916,66.802 v1(89.916,70.358)
PB11: J5.10 U2.22 | length 19.3
  Top Layer w0.2: v1(79.152,60.63) 79.228,60.553 79.228,60.172 80.169,59.231 80.169,58.88 U2.22 ; v1(87.376,70.358) J5.10@87.376,72.208
  Bottom Layer w0.2: v1(79.152,60.63) 79.152,62.261 83.712,66.821 87.249,66.821 87.376,66.948 v1(87.376,70.358)
RF_ANTENNA: C27.2 P1.1 | length 7.2
  Top Layer w0.336: P1.1 38.735,51.435 C27.2
RF_N: C26.1 L2.1 U4.13 | length 4.4
  Top Layer w0.2: L2.1 C26.1 54.102,51.308 54.309,51.515 U4.13
RF_P: C28.1 L5.2 U4.12 | length 3.7
  Top Layer w0.2: C28.1 52.895,52.557 54.081,52.557 L5.2 54.102,52.132 54.219,52.015 U4.12
SPI2_MISO: TP12.1 U2.27 U4.20 | length 34.5
  Top Layer w0.2: U4.20 58.904,49.046 59.182,48.768 v1(59.563,48.768) 60.452,48.768 61.849,47.371 TP12.1 ; v1(75.327,58.897) 76.212,58.013 76.913,58.013 77.721,57.205 U2.27
  Bottom Layer w0.2: v1(59.563,48.768) 67.437,48.768 68.199,49.53 68.199,58.253 68.844,58.897 v1(75.327,58.897)
SPI2_MOSI: TP11.1 U2.28 U4.2 | length 29.2
  Top Layer w0.2: U4.2 59.748,51.035 v1@68.942,51.035 ; TP11.1 67.945,48.514 68.072,48.641 68.072,50.165 v1@68.942,51.035 ; v1(68.961,51.054) v1@68.942,51.035 ; v1(75.327,57.542) 75.784,57.085 77.1,57.085 77.48,56.705 U2.28
  Bottom Layer w0.2: v1(68.961,51.054) 69.723,51.054 70.485,51.816 70.485,57.425 70.602,57.542 v1(75.327,57.542)
SPI2_nSS: TP14.1 U2.25 U4.7 | length 36.1
  Top Layer w0.2: U4.7 58.404,54.031 58.801,54.428 v1(58.801,54.483) ; v1(74.931,60.384) 75.008,60.308 76.597,60.308 77.597,59.308 77.597,58.857 78.199,58.255 78.544,58.255 U2.25
  Bottom Layer w0.2: TP14.1 52.197,56.515 54.229,54.483 v1(58.801,54.483) 66.294,54.483 66.929,55.118 66.929,58.801 68.512,60.384 v1(74.931,60.384)
SPI2_SCK: TP13.1 U2.26 U4.1 | length 31.5
  Top Layer w0.2: U4.1 60.229,50.515 60.706,50.038 v1(60.96,50.038) 62.235,48.763 63.124,48.763 TP13.1 ; v1(74.917,59.585) 76.139,59.585 78.019,57.705 U2.26
  Bottom Layer w0.2: v1(60.96,50.038) 67.056,50.038 67.691,50.673 67.691,58.547 68.729,59.585 v1(74.917,59.585)
SW: L1.1 U1.1
SWCLK: J3.3 U2.37 | length 28
  Top Layer w0.2: v1(78.867,36.068) 78.867,33.909 79.375,33.401 82.55,33.401 83.185,32.766 J3.3 ; U2.37 79.219,51.591 v1(79.629,51.181)
  Bottom Layer w0.2: v1(78.867,36.068) 78.867,42.037 78.394,42.51 78.394,49.438 79.629,50.673 v1(79.629,51.181)
SWDIO: J3.2 U2.34 | length 30
  Top Layer w0.2: v1(76.327,52.959) 77.147,52.959 77.893,53.705 U2.34 ; v1(77.47,36.068) 77.47,33.401 77.978,32.893 80.137,32.893 80.645,32.385 J3.2
  Bottom Layer w0.2: v1(76.327,52.959) 76.33,52.956 76.33,45.726 76.549,45.507 76.549,38.386 77.47,37.465 v1(77.47,36.068)
UART_RX: J6.3 U2.13 | length 24.9
  Top Layer w0.2: J6.3 v1(75.819,70.358) 77.308,68.869 86.325,68.869 86.614,68.58 86.614,60.246 86.497,60.129 v1(85.375,60.129) 85.356,60.129 84.714,59.487 84.714,58.835 U2.13
UART_TX: J6.4 U2.12 | length 29.3
  Top Layer w0.2: v1(73.279,70.358) J6.4 ; v1(77.597,69.469) 86.741,69.469 87.122,69.088 87.122,58.674 86.929,58.481 v1(86.121,58.481) 86.119,58.481 85.843,58.205 U2.12
  Bottom Layer w0.2: v1(73.279,70.358) 73.279,69.723 73.533,69.469 v1(77.597,69.469)
USB_D_N: J2.2 J6.5 TP1.1 U2.32 | length 89.7
  Top Layer w0.2: v1(70.739,70.358) J6.5
  Top Layer w0.221: v1(77.089,54.905) 77.192,54.905 77.417,54.68 77.858,54.68 77.91,54.629 78.313,54.629 78.35,54.665 78.554,54.665 U2.32 ; J2.2 100.86,29.173 100.86,30.087 100.799,30.148 100.799,30.764 100.777,30.786 100.777,31.431 101.003,31.657 v1(101.003,31.75)
  Bottom Layer w0.221: v1(70.739,70.358) 69.772,70.358 69.643,70.229 69.643,68.814 69.91,68.547 74.693,68.547 76.454,66.786 76.454,54.6 76.687,54.368 76.869,54.368 77.022,54.521 77.022,54.838 v1(77.089,54.905) 77.1,54.894 77.551,54.894 77.675,55.017 84.954,55.017 85.979,53.992 85.979,47.975 86.108,47.846 87.028,47.846 89.027,45.847 89.027,33.401 89.289,33.139 91.575,33.139 92.185,33.749 100.22,33.749 100.777,33.192 100.777,32.069 101.003,31.843 v1(101.003,31.75) 101.003,31.657 100.777,31.431 100.777,29.779 101.346,29.21 106.045,29.21 106.807,29.972 106.807,31.369 107.362,31.924 109.013,31.924 TP1.1
USB_D_P: J2.3 J6.6 TP2.1 U2.33 | length 89.4
  Top Layer w0.2: v1(68.199,70.358) J6.6
  Top Layer w0.221: v1(77.482,54.143) 77.585,54.143 77.723,54.281 78.313,54.281 78.35,54.245 78.554,54.245 U2.33 ; v1(100.203,31.75) 100.203,31.657 100.429,31.431 100.429,30.642 100.451,30.62 100.451,30.148 100.39,30.087 100.39,29.173 J2.3
  Bottom Layer w0.221: v1(68.199,70.358) 69.166,70.358 69.295,70.229 69.295,68.67 69.766,68.199 74.549,68.199 76.106,66.642 76.106,54.456 76.543,54.02 77.013,54.02 77.084,54.09 77.43,54.09 v1(77.482,54.143) ; v1@77.555,54.406 77.819,54.67 84.81,54.67 85.631,53.848 85.631,47.831 85.964,47.498 86.884,47.498 88.679,45.703 88.679,33.257 89.145,32.791 91.719,32.791 92.329,33.401 100.076,33.401 100.429,33.048 100.429,32.069 100.203,31.843 v1(100.203,31.75) 100.203,31.657 100.429,31.431 100.429,29.635 101.202,28.862 106.189,28.862 107.155,29.828 107.155,31.225 107.506,31.576 109.013,31.576 TP2.1
VDD: C9.2 C10.2 C11.2 FB2.2 J3.1 R4.2 R7.2 R8.2 TP9.1 U2.1 U2.24 U2.48 | length 79.1
  Top Layer w0.2: J3.1 v1(78.105,30.607) ; v1(78.486,59.817) 78.563,59.74 78.944,59.74 79.219,59.465 U2.24 ; 84.719,51.219 U2.48 84.729,52.07 85.227,52.07 85.344,52.187 U2.1 ; v1(85.09,33.274) TP9.1 85.09,37.154 R8.2 R7.2
  Top Layer w0.4: R4.2 C9.2 C10.2 C11.2 FB2.2 v1(87.122,48.895) 87.122,50.419 86.322,51.219 84.719,51.219
  POWER w0.5: v1(78.105,30.607) 78.086,30.626 78.086,32.747 78.613,33.274 v1(85.09,33.274) 86.36,33.274 91.694,38.608 91.694,48.26 91.059,48.895 v1(87.122,48.895) 87.058,48.831 79.057,48.831 v1(78.994,48.768) 77.978,48.768 77.47,49.276 77.47,51.689 78.486,52.705 v1(78.486,59.817)
VDDA: C18.2 FB4.2 R6.2 TP15.1 U2.9 | length 16.2
  Top Layer w0.2: U2.9 86.044,56.705 86.362,57.023 v1(86.995,57.023)
  Top Layer w0.7: C18.2 77.781,62.992 84.417,62.992 85.433,61.976 v1(85.598,61.976)
  POWER w0.7: v1(85.598,61.976) 86.585,61.976 86.995,61.566 v1(86.995,57.023)
VDDUSB: C13.2 C14.2 C15.2 FB3.2 R5.2 TP10.1 U2.36 | length 19.3
  Top Layer w0.2: v1(74.549,50.165) 75.311,50.927 v1(78.486,50.927) 78.54,50.981 78.54,52.655 78.59,52.705 U2.36
  Top Layer w0.4: FB3.2 v1(74.549,50.165) ; R5.2@73.279,58.293 v1(74.803,58.293)
  Top Layer w0.6: FB3.2 C13.2 C14.2 C15.2 R5.2 73.279,58.293 TP10.1
VIN: C2.2 C3.2 C5.2 C8.1 FB1.2 R2.1 TP5.1 U1.3 U1.8 | length 13.8
  Top Layer w0.2: TP5.1 96.082,43.491 96.082,44.901 v1(96.139,44.958) ; TP5.1@96.149,43.424 FB1.2@98.612,43.424 ; v1@96.911,50.79 98.021,50.79 R2.1 ; v1@97.292,45.71 C2.2@98.612,45.71 ; v1@97.292,47.615 C3.2@98.612,47.615 ; U1.3@100.594,55.87 v1@102.225,55.87 ; C8.1@100.781,52.821 C5.2 100.838,50.87 v1(100.838,49.657) ; v1@105.674,58.41 U1.8@106.874,58.41
  other v1: 97.282,45.72 97.282,47.625 96.901,50.8 102.235,55.88 105.664,58.42
pads on no net: J2.4 J2.9 J2.13 J2.14 U2.2 U2.10 U2.38 U2.39 U3.1 U3.2 U3.3 U3.4 U3.9 U3.10 U3.11 U3.12 U4.3 U4.6

## Polygon pours and split planes (outlines as drawn)
DVDD on POWER "DVDD_L03_P040" (solid, pour order 40): 51.943,49.911 53.975,47.879 62.865,47.879 64.516,49.53 64.516,66.929 63.246,68.199 53.34,68.199 52.07,66.929
3V3 on POWER "3V3_L03_P045" (solid, pour order 45): 113.411,58.039 113.284,58.039 111.379,56.134 108.077,56.134 107.061,57.15 107.061,62.611 105.664,64.008 73.152,64.008 72.39,63.246 72.39,46.99 73.025,46.355 87.884,46.355 89.027,45.212 89.027,41.656 87.63,40.259 65.405,40.259 64.008,41.656 64.008,47.498 66.294,49.784 66.294,70.485 66.929,71.12 112.141,71.12 113.411,69.85
VIN on POWER "VIN_L03_P042" (solid, pour order 42): 105.918,59.69 106.426,59.182 106.426,48.514 105.664,47.752 99.568,47.752 98.679,46.863 98.679,43.688 97.917,42.926 95.123,42.926 95.123,43.053 93.853,44.323 93.853,59.055 94.488,59.69
+VIN on POWER "+VIN_L03_P038" (solid, pour order 38): 99.568,44.196 99.949,44.577 104.902,44.577 106.045,45.72 113.157,45.72 114.681,44.196 114.681,27.305 113.919,26.543 100.711,26.543 99.568,27.686
SW on Top Layer "SW_L01_P008" (solid, pour order 8): 97.663,63.373 98.298,64.008 102.489,64.008 104.14,62.357 104.14,58.039 103.886,57.785 98.044,57.785 97.663,58.166
GND on GND "GND_L02_P043" (solid, pour order 43): 117.729,74.422 116.586,75.565 35.179,75.565 34.163,74.549 34.163,26.543 34.29,26.543 34.798,26.035 117.602,26.035

## Silkscreen, mask and mechanical layers (free items; w line width, h text height)
Top Overlay:
  text "COMPUTADOR DE BORDO Ed01r2" at 34.948,73.429 h1
  text "Universidade Presbiteriana Mackenzie" at 35.523,72.226 h0.7
Bottom Overlay:
  text "Gianfranco Avona Covello  - 26/03/2023" at 60.138,73.72 h0.6
Board Outline:
  the board outline again, w0.254

## Text inside footprints (layer, text, board x,y; h text height)
J3: Top Overlay "FLASH_SWD" at 87.037,26.756 h0.5 r180; Top Overlay "GND" at 88.434,30.311 h0.5 r90; Top Overlay "NJRST" at 85.894,30.311 h0.5 r90; Top Overlay "SWCLK" at 83.481,30.184 h0.5 r90; Top Overlay "SWDIO" at 80.941,30.184 h0.5 r90; Top Overlay "VCC" at 78.655,30.287 h0.5 r90; Top Overlay "NRST" at 90.847,30.311 h0.5 r90
J4: Top Overlay "GPIO PORT_A" at 67.86,26.756 h0.5 r180; Top Overlay "PA8" at 59.859,31.411 h0.5 r180; Top Overlay "PA10" at 65.066,31.411 h0.5 r180; Top Overlay "PA9" at 62.399,31.411 h0.5 r180; Top Overlay "PB8" at 69.892,31.411 h0.5 r180; Top Overlay "PB5" at 67.479,31.411 h0.5 r180; Top Overlay "PB9" at 72.559,31.411 h0.5 r180
J5: Top Overlay "PB11" at 86.318,69.808 h0.6; Top Overlay "PB10" at 88.858,69.808 h0.6; Top Overlay "PB2" at 91.652,69.808 h0.6; Top Overlay "PB1" at 94.319,69.902 h0.6; Top Overlay "GPIO PORT_B" at 96.986,74.607 h0.6; Top Overlay "PA1" at 109.432,69.902 h0.6; Top Overlay "PA4" at 106.638,69.902 h0.6; Top Overlay "PA5" at 104.225,69.902 h0.6; Top Overlay "PA6" at 101.685,69.902 h0.6; Top Overlay "PA7" at 99.272,69.902 h0.6; Top Overlay "PB0" at 96.732,69.902 h0.6
J6: Top Overlay "GND" at 77.597,69.867 h0.5; Top Overlay "DN" at 70.358,69.867 h0.5; Top Overlay "TX" at 72.644,69.867 h0.5; Top Overlay "DP" at 67.691,69.867 h0.5; Top Overlay "COMUNICACAO_DBG" at 69.596,74.295 h0.5; Top Overlay "RX" at 75.057,69.867 h0.5; Top Overlay "3V3" at 80.01,69.867 h0.5